# Altium PCB RYA_ESC.PcbDoc (part 4 of 4)
Units mm, origin at the board's own origin, x right, y up, seen from the top; angles counter-clockwise.
Board outline 81.86 x 50.16 mm, 4 copper layers (Top Layer, Signal1, Signal2, Bottom Layer), stack 1.586 mm thick; 309 components, 155 nets, 862 pads, 372 vias.
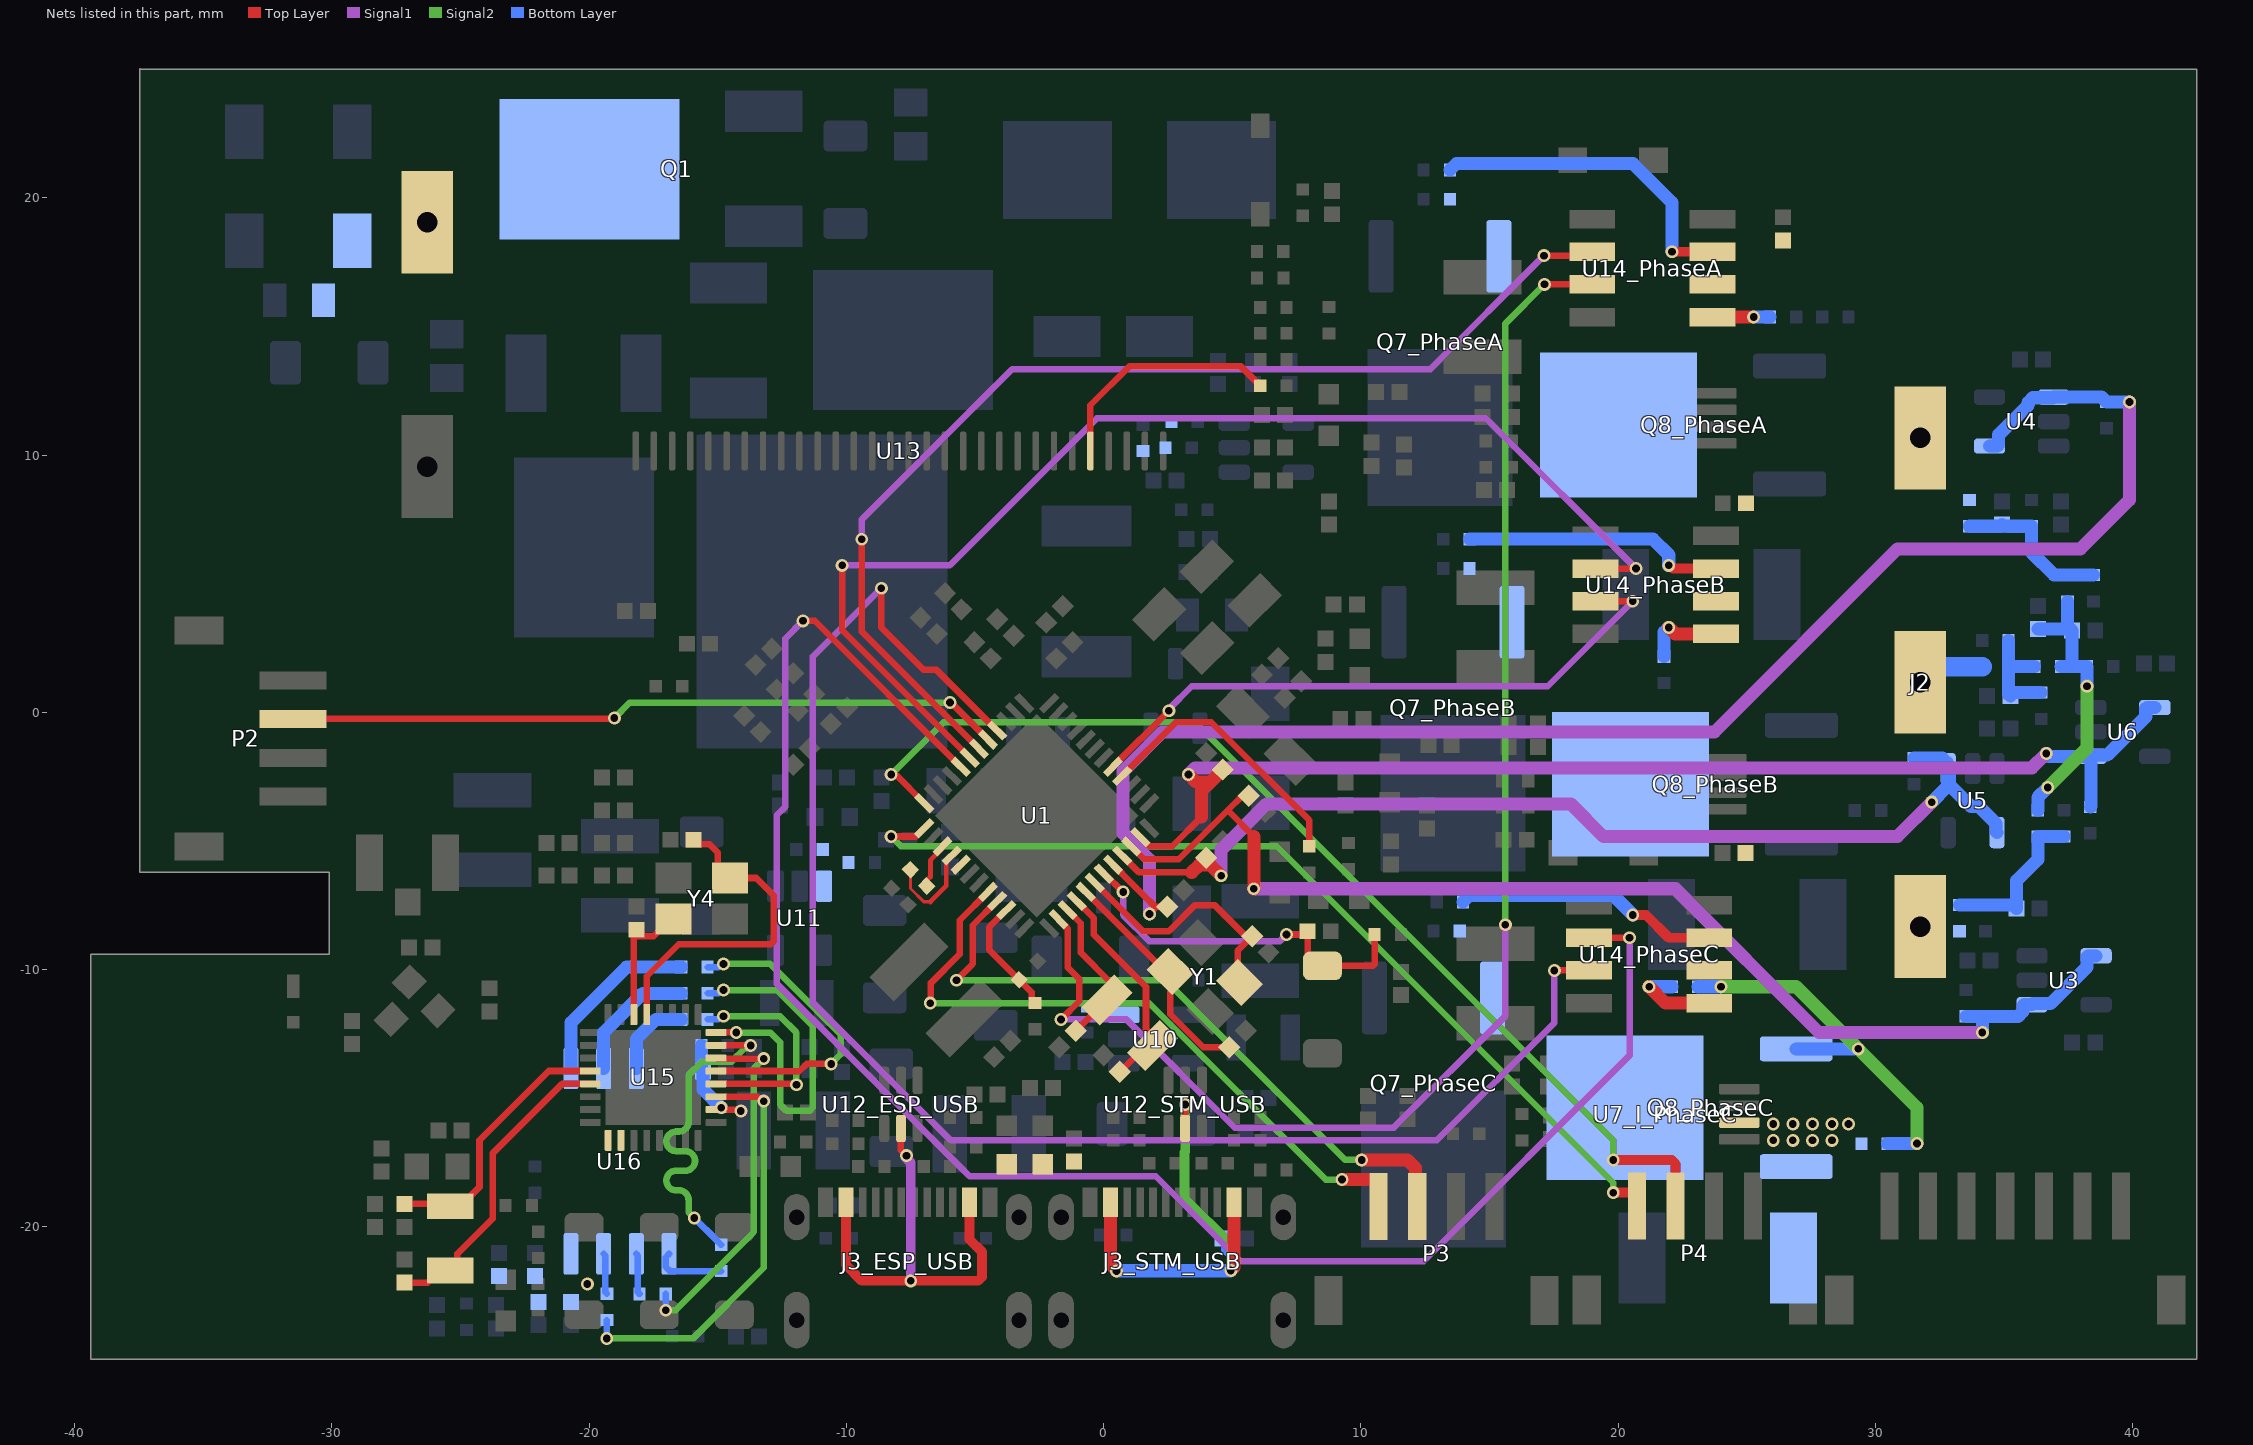
[diagram p5: the nets of this part, all layers, seen from the top]

## Via types
v1: diameter 0.5, hole 0.3, Top Layer to Bottom Layer, tented both sides, 148 vias
v2: diameter 0.5, hole 0.3, Top Layer to Signal1, tented both sides, 58 vias
v3: diameter 0.5, hole 0.3, Top Layer to Signal2, tented both sides, 52 vias
v4: diameter 1.27, hole 0.711, Top Layer to Bottom Layer, tented both sides, 48 vias
v5: diameter 0.508, hole 0.3, Top Layer to Bottom Layer, tented both sides, 34 vias
v6: diameter 0.5, hole 0.3, Bottom Layer to Signal2, tented both sides, 19 vias
v7: diameter 0.5, hole 0.3, Bottom Layer to Signal1, tented both sides, 5 vias
v8: diameter 1.27, hole 0.711, Top Layer to Bottom Layer, 4 vias
v9: diameter 0.5, hole 0.3, Signal1 to Signal2, tented both sides, 4 vias

## Nets (pads, with @x,y where several pads share a name; then routed paths per layer and width w, separated by ;. In a path a pad name is that pad's centre, name@x,y a point inside that pad or via, vN(x,y) a via of type N, cw(c..) or ccw(c..) an arc to the next point about the centre after c; other vN are vias at no path point) (continued)
NetQ8_PhaseC_1: Q8_PhaseC.1 R59_PhaseC.2 R60_PhaseC.2 | length 15.4
  Signal2 w0.508: v6(24.003,-10.668) 26.924,-10.668 31.623,-15.367 v6(31.623,-16.764)
  Bottom Layer w0.127: v6@31.619,-16.768 v6(31.623,-16.764)
  Bottom Layer w0.508: R59_PhaseC.2@23.118,-10.668 v6(24.003,-10.668) ; Q8_PhaseC.1@26.924,-13.081 v6(29.337,-13.081) ; R60_PhaseC.2@30.484,-16.768 v6@31.619,-16.768
NetQ8_PhaseC_3: Q8_PhaseC.3 R26_I_PhaseC.1 R60_PhaseC.1 U7_I_PhaseC.2
  other v1: 26.035,-16.637 26.797,-16.637 27.559,-16.637 28.321,-16.637 26.035,-16.002 26.797,-16.002 27.559,-16.002 28.321,-16.002 28.956,-16.002
NetR5_1: R5.1 R6.2 U1.46 | length 4.6
  Top Layer w0.254: U1.46@-3.783,-7.686 -4.445,-8.349 -4.445,-9.233 R5.1@-3.283,-10.395 -2.79,-10.888 -2.79,-11.184 -2.679,-11.295 R6.2@-2.667,-11.295
NetR28_1: R28.1 R29.2 R31.2
NetR32_1: R32.1 R34.2 U10.3
NetR35_1: R35.1 R37.2 U11.3
NetR49_2: R49.2 U13.26 | length 9.3
  Top Layer w0.254: U13.26@-0.512,10.16 -0.512,11.934 1.016,13.462 5.326,13.462 5.969,12.819 5.981,12.819 6.092,12.708 R49.2@6.092,12.696
NetR57_PhaseA_1: R57_PhaseA.1 U14_PhaseA.7 | length 12.9
  Top Layer w0.381: v1(22.098,17.907) U14_PhaseA.7@23.676,17.907
  Bottom Layer w0.508: R57_PhaseA.1@13.466,21.082 13.72,21.336 20.574,21.336 22.098,19.812 v1(22.098,17.907)
NetR57_PhaseB_1: R57_PhaseB.1 U14_PhaseB.7 | length 10.3
  Top Layer w0.381: v1(21.971,5.715) 22.003,5.715 22.13,5.588 U14_PhaseB.7@23.803,5.588
  Bottom Layer w0.508: R57_PhaseB.1@14.228,6.731 21.36,6.731 21.971,6.12 v1(21.971,5.715)
NetR57_PhaseC_1: R57_PhaseC.1 U14_PhaseC.7 | length 10.4
  Top Layer w0.381: v1(20.574,-7.874) 21.082,-7.874 21.971,-8.763 U14_PhaseC.7@23.549,-8.763
  Bottom Layer w0.508: R57_PhaseC.1@13.974,-7.366 14.228,-7.112 19.812,-7.112 v1(20.574,-7.874)
NetR59_PhaseA_1: R59_PhaseA.1 U14_PhaseA.5 | length 2.2
  Top Layer w0.508: U14_PhaseA.5@23.676,15.367 v1(25.273,15.367)
  Bottom Layer w0.508: v1(25.273,15.367) R59_PhaseA.1@25.904,15.367
NetR59_PhaseB_1: R59_PhaseB.1 U14_PhaseB.5 | length 3.5
  Top Layer w0.127: U14_PhaseB.5@23.549,3.302 U14_PhaseB.5@23.803,3.048
  Top Layer w0.508: v1(21.971,3.302) 22.225,3.048 U14_PhaseB.5@23.803,3.048
  Bottom Layer w0.508: R59_PhaseB.1@21.789,2.163 21.789,3.12 v1(21.971,3.302)
NetR59_PhaseC_1: R59_PhaseC.1 U14_PhaseC.5 | length 3.5
  Top Layer w0.508: v1(21.209,-10.668) 21.844,-11.303 U14_PhaseC.5@23.549,-11.303
  Bottom Layer w0.508: v1(21.209,-10.668) R59_PhaseC.1@22.094,-10.668
NetR63_2: R63.2 U16.1 | length 7
  Bottom Layer w0.508: U16.1@-20.701,-13.843 -20.701,-12.065 -18.542,-9.906 R63.2@-16.415,-9.906
NetR64_2: R64.2 U16.6 | length 1.6
  Bottom Layer w0.254: U16.6@-18.161,-21.053 -18.099,-21.114 -18.099,-22.545 R64.2@-18.038,-22.606
NetR65_2: R65.2 U16.5 | length 2.8
  Bottom Layer w0.254: U16.5@-16.891,-21.053 -17.018,-21.18 -17.018,-21.558 -16.855,-21.721 R65.2@-14.859,-21.721
NetR66_2: R66.2 U16.2 | length 5
  Bottom Layer w0.508: U16.2@-19.431,-13.843 -19.431,-12.446 -17.907,-10.922 R66.2@-16.415,-10.922
NetR70_2: R70.2 U16.3 | length 3.2
  Bottom Layer w0.508: U16.3@-18.161,-13.843 -18.161,-12.7 -17.399,-11.938 R70.2@-16.415,-11.938
NetR71_2: R71.2 U16.7 | length 1.6
  Bottom Layer w0.254: U16.7@-19.431,-21.053 -19.367,-21.116 -19.367,-22.538 R71.2@-19.304,-22.602
NetU1_2: U1.2 U14_PhaseA.3 | length 56.3
  Top Layer w0.254: U1.2@-1.753,-8.04 -1.753,-8.051 -1.397,-8.407 -1.397,-9.906 -0.942,-10.361 -0.942,-11.229 v2(-1.651,-11.938) ; v3(17.145,16.637) U14_PhaseA.3@18.996,16.637
  Signal1 w0.254: v2(-1.651,-11.938) 0.889,-11.938 5.101,-16.15 11.275,-16.15 15.621,-11.804 v9(15.621,-8.255)
  Signal2 w0.254: v9(15.621,-8.255) 15.621,15.113 v3(17.145,16.637)
NetU1_17: U1.17 U14_PhaseB.3 | length 24.4
  Top Layer w0.127: U1.17@0.368,-2.121 U1.17@0.368,-2.11
  Top Layer w0.254: U1.17@0.368,-2.11 v2(2.54,0.062) ; U14_PhaseB.3@19.123,4.318 v2(20.574,4.318)
  Signal1 w0.254: v2(2.54,0.062) 2.54,0.127 3.429,1.016 17.272,1.016 v2(20.574,4.318)
NetU1_28: U1.28 U14_PhaseC.3 | length 61.2
  Top Layer w0.254: v2(-8.636,4.826) -8.636,3.302 -6.985,1.651 -6.494,1.651 U1.28@-4.136,-0.707 ; v2(17.526,-10.033) U14_PhaseC.3@18.869,-10.033
  Signal1 w0.254: v2(-8.636,4.826) -11.303,2.159 -11.303,-11.281 -5.947,-16.637 12.954,-16.637 17.526,-12.065 v2@17.526,-10.04
NetU1_30: U1.30 U14_PhaseA.2 | length 43.5
  Top Layer w0.127: U14_PhaseA.2@18.843,17.754 U14_PhaseA.2@18.996,17.907
  Top Layer w0.254: v2(-9.398,6.731) -9.398,3.141 U1.30@-4.843,-1.414 ; v2(17.119,17.754) U14_PhaseA.2@18.843,17.754
  Signal1 w0.254: v2(-9.398,6.731) -9.398,7.493 -3.556,13.335 12.7,13.335 v2(17.119,17.754)
NetU1_31: U1.31 U14_PhaseB.2 | length 46.8
  Top Layer w0.254: v2(-10.16,5.715) -10.16,3.195 U1.31@-5.197,-1.768 ; U14_PhaseB.2@19.123,5.588 v2(20.701,5.588)
  Signal1 w0.254: v2(-10.16,5.715) -5.969,5.715 -0.254,11.43 14.859,11.43 v2(20.701,5.588)
NetU1_32: U1.32 U14_PhaseC.2 | length 70.1
  Top Layer w0.254: v2(-11.684,3.556) -11.228,3.556 U1.32@-5.55,-2.121 ; U14_PhaseC.2@18.869,-8.763 v2(20.447,-8.763)
  Signal1 w0.254: v2(-11.684,3.556) -12.376,2.864 -12.376,-3.677 -12.7,-4.001 -12.7,-10.541 -5.207,-18.034 2.032,-18.034 5.334,-21.336 12.446,-21.336 20.447,-13.335 v2(20.447,-8.763)
NetU1_41: U1.41
NetU15_9: U15.9
NetU15_10: U15.10
NeuSig: C36.2 R24.2 U1.11 U6.1 U6.4 | length 47
  Top Layer w0.254: U1.11@1.429,-4.858 1.44,-4.858 1.789,-5.207 2.667,-5.207 3.81,-4.064
  Top Layer w0.508: v2(3.302,-2.413) 3.601,-2.712 4.148,-2.712 ; 3.81,-4.064 3.81,-3.049 4.148,-2.712 ; C36.2@4.636,-2.223 4.148,-2.712
  Signal1 w0.508: v2(3.302,-2.413) 3.556,-2.159 36.084,-2.159 v7(36.645,-1.598)
  Bottom Layer w0.508: v7(36.645,-1.598) 36.759,-1.712 U6.1@38.379,-1.712 ; R24.2@38.358,-3.679 38.379,-3.658 U6.1@38.379,-1.712 ; U6.4@40.869,0.188 40.559,0.188 40.513,0.142 40.513,-0.168 39.015,-1.666 38.425,-1.666 U6.1@38.379,-1.712
NeuVolt: C26.2 C35.2 R11.1 R13.1 R15.1 R23.2 | length 11.4
  Signal2 w0.508: v6(36.703,-2.921) 38.227,-1.397 v6(38.227,1.016)
  Bottom Layer w0.508: R11.1@36.318,-3.806 36.318,-3.306 v6(36.703,-2.921) ; C35.2@36.322,3.233 37.592,3.233 C26.2@37.65,3.175 ; R13.1@37.215,1.782 37.219,1.778 37.576,1.778 ; R15.1@37.469,4.314 37.469,3.356 C26.2@37.65,3.175 ; v6(38.227,1.016) 38.223,1.02 R23.2@38.223,1.778 37.576,1.778 ; 37.576,1.778 37.65,1.852 C26.2@37.65,3.175
OSC32_IN: C20.2 U1.3 Y2.1 | length 6
  Top Layer w0.254: U1.3@-1.4,-7.686 -0.889,-8.197 -0.889,-9.34 0.278,-10.508 0.278,-11.035 Y2.1@0.132,-11.181 0.122,-11.181 C20.2@-1.079,-12.382
OSC32_OUT: C21.2 U1.4 Y2.2 | length 8.6
  Top Layer w0.254: U1.4@-1.046,-7.333 -0.372,-8.007 -0.372,-8.645 1.651,-10.668 1.651,-12.326 2.027,-12.702 2.027,-12.822 Y2.2@1.9,-12.949 1.659,-12.949 C21.2@0.636,-13.971
OSC_IN: C18.2 U1.5 Y1.1 | length 9.2
  Top Layer w0.254: U1.5@-0.692,-6.979 2.149,-9.821 2.339,-9.821 2.466,-9.948 Y1.1@2.664,-10.146 ; Y1.1@2.591,-10.077 2.664,-10.151 2.664,-10.815 2.591,-10.888 2.591,-11.735 3.874,-13.018 C18.2@4.889,-13.018
OSC_OUT: C19.2 U1.6 Y1.3 | length 9.9
  Top Layer w0.254: U1.6@-0.339,-6.626 1.544,-8.509 2.54,-8.509 3.556,-7.493 4.318,-7.493 5.524,-8.699 C19.2@5.778,-8.699 5.21,-9.267 5.21,-10.428 Y1.3@5.281,-10.499
PC4: R4.2 U1.16 | length 10.7
  Top Layer w0.254: U1.16@0.722,-2.475 2.816,-0.381 4.191,-0.381 7.997,-4.187 R4.2@7.997,-5.203
PhaseA: C79_PhaseA.2 J2.1 Q7_PhaseA.3 Q8_PhaseA.4 R8.2 R58_PhaseA.1 U14_PhaseA.6
PhaseB: C79_PhaseB.2 J2.2 Q7_PhaseB.3 Q8_PhaseB.4 R9.2 R58_PhaseB.1 U14_PhaseB.6 | length 2.7
  Bottom Layer w0.762: J2.2@31.75,1.168 32.36,1.778 R9.2@34.155,1.778
PhaseC: C79_PhaseC.2 J2.3 Q7_PhaseC.3 Q8_PhaseC.4 R10.2 R58_PhaseC.1 U14_PhaseC.6
PhASig: C32.2 R21.2 U1.8 U4.1 U4.4 | length 63
  Top Layer w0.254: U1.8@0.368,-5.918 1.14,-6.69 1.499,-7.049 1.996,-7.547 2.007,-7.557 2.014,-7.557 ; v2(1.786,-7.839) 2.014,-7.612 2.014,-7.557 ; C32.2@2.476,-7.557 2.014,-7.557
  Signal1 w0.508: v2(1.786,-7.839) 1.786,-5.723 0.762,-4.699 0.762,-2.286 2.286,-0.762 23.749,-0.762 30.861,6.35 37.973,6.35 39.878,8.255 v7(39.878,12.065)
  Bottom Layer w0.127: R21.2@38.993,12.069 R21.2@38.997,12.065
  Bottom Layer w0.508: U4.4@34.442,10.353 34.752,10.353 34.798,10.399 34.798,10.795 35.941,11.938 35.941,12.042 36.127,12.228 36.907,12.228 U4.1@36.932,12.253 38.797,12.253 38.981,12.069 R21.2@38.993,12.069 ; R21.2@38.997,12.065 v7(39.878,12.065)
PhAVolt: C29.2 R8.1 R15.2 R16.2 R19.2 | length 6.3
  Bottom Layer w0.508: R8.1@33.659,7.235 34.863,7.235 C29.2@34.925,7.297 34.981,7.241 35.161,7.241 35.167,7.235 R19.2@36.068,7.235 36.068,6.223 36.953,5.338 R16.2@38.485,5.338
PhBSig: C33.2 R22.2 U1.9 U5.1 U5.4 | length 41.9
  Top Layer w0.254: U1.9@0.722,-5.565 1.38,-6.223 3.429,-6.223
  Top Layer w0.508: 3.429,-6.223 3.714,-5.938 ; C33.2@4,-5.652 3.714,-5.938 ; v2(4.572,-6.35) 4.16,-5.938 3.714,-5.938
  Signal1 w0.508: v2(4.572,-6.35) 4.572,-5.334 6.35,-3.556 18.161,-3.556 19.431,-4.826 30.861,-4.826 v7(32.196,-3.491)
  Bottom Layer w0.508: R22.2@31.5,-1.774 32.602,-1.774 32.832,-2.004 U5.1@32.832,-2.184 ; v7(32.196,-3.491) 32.805,-2.882 32.805,-2.211 U5.1@32.832,-2.184 ; U5.4@34.732,-4.674 34.686,-4.628 34.686,-4.318 34.026,-3.658 33.716,-3.658 32.878,-2.82 32.878,-2.23 U5.1@32.832,-2.184
PhBVolt: C31.2 R9.1 R13.2 R17.2 R20.2 | length 4.5
  Bottom Layer w0.508: R17.2@35.183,2.79 35.183,1.782 R9.1@35.179,1.778 ; R13.2@36.191,1.782 36.187,1.778 R9.1@35.179,1.778 ; R20.2@36.449,0.766 35.379,0.766 C31.2@35.248,0.635 35.179,0.704 R9.1@35.179,1.778
PhCSig: C25.2 R14.2 U1.10 U3.1 U3.4 | length 46.9
  Top Layer w0.254: U1.10@1.075,-5.211 1.579,-5.715 2.921,-5.715 4.826,-3.81 ; C25.2@5.651,-3.238 5.398,-3.238 4.826,-3.81 ; 5.842,-4.826 4.826,-3.81
  Top Layer w0.508: v2(5.842,-6.858) 5.842,-4.826
  Signal1 w0.508: v2(5.842,-6.858) 22.225,-6.858 27.813,-12.446 v7(34.163,-12.446)
  Bottom Layer w0.508: R14.2@33.536,-11.815 34.163,-11.815 ; v7(34.163,-12.446) 34.163,-11.815 ; U3.4@38.583,-9.464 38.273,-9.464 38.227,-9.51 38.227,-9.906 36.815,-11.318 36.139,-11.318 U3.1@36.093,-11.364 35.783,-11.364 35.737,-11.41 35.737,-11.629 35.551,-11.815 34.163,-11.815
PhCVolt: C24.2 R10.1 R11.2 R12.2 R18.2 | length 6.4
  Bottom Layer w0.508: R10.1@33.27,-7.489 R12.2@34.29,-7.489 35.36,-7.489 C24.2@35.491,-7.62 35.491,-6.546 36.318,-5.719 R11.2@36.318,-4.83 R18.2@37.334,-4.83
PWM_IN: P2.2 U1.29 | length 27.9
  Top Layer w0.254: P2.2@-31.513,-0.266 -31.489,-0.242 -19.038,-0.242 v3(-19.014,-0.218) ; v3(-5.969,0.381) -5.931,0.381 U1.29@-4.49,-1.061
  Signal2 w0.254: v3(-19.014,-0.218) -18.415,0.381 v3(-5.969,0.381)
RESET: C12.2 R7.1 U1.7 U2.2 | length 14.4
  Top Layer w0.127: U1.7@0.015,-6.272 U1.7@0.049,-6.272
  Top Layer w0.254: U1.7@0.049,-6.272 v2(0.762,-6.985) ; v2(7.112,-8.636) 7.805,-8.636 C12.2@7.932,-8.509 7.932,-9.379 U2.2@8.41,-9.857 ; U2.2@8.509,-9.857 10.467,-9.857 10.541,-9.783 10.541,-8.636 R7.1@10.537,-8.632
  Signal1 w0.254: v2(0.762,-6.985) 0.762,-7.874 1.778,-8.89 6.858,-8.89 v2(7.112,-8.636)
SPICLK: R64.1 U15.22 | length 14.1
  Top Layer w0.127: U15.22@-15.061,-13.442 U15.22@-15.041,-13.462
  Top Layer w0.254: U15.22@-15.041,-13.462 v3(-13.208,-13.462)
  Signal2 w0.254: v6(-17.018,-23.241) -16.637,-23.241 -13.593,-20.197 -13.593,-13.847 v3(-13.208,-13.462)
  Bottom Layer w0.127: v6(-17.018,-23.241) v6@-17.014,-23.237
  Bottom Layer w0.254: v6@-17.014,-23.237 R64.1@-17.014,-22.606
SPICS0: R63.1 U15.21 | length 12.3
  Top Layer w0.127: U15.21@-15.061,-13.942 U15.21@-15.047,-13.956
  Top Layer w0.254: U15.21@-15.047,-13.95 -15.039,-13.942 -12.723,-13.942 -12.709,-13.956 -11.826,-13.956 -11.538,-13.668 v3(-10.589,-13.668)
  Signal2 w0.254: v6(-14.777,-9.779) -12.954,-9.779 -10.212,-12.521 -10.212,-13.291 v3(-10.589,-13.668)
  Bottom Layer w0.254: R63.1@-15.391,-9.906 -14.97,-9.906 -14.843,-9.779 v6(-14.777,-9.779)
SPID: R65.1 U15.23 | length 14
  Top Layer w0.127: U15.23@-15.061,-12.942 U15.23@-15.055,-12.948 ; v3@-13.722,-12.948 v3(-13.716,-12.954)
  Top Layer w0.254: U15.23@-15.055,-12.948 v3@-13.722,-12.948
  Signal2 w0.254: v6(-15.908,-19.652) -16.129,-19.431 -16.129,-19.087 -16.129,-18.96 ccw(c-16.51,-18.96) -16.51,-18.579 -16.613,-18.579 cw(c-16.613,-18.198) -16.613,-17.817 -16.261,-17.817 ccw(c-16.261,-17.436) -16.261,-17.055 -16.613,-17.055 cw(c-16.613,-16.674) -16.613,-16.293 -16.51,-16.293 ccw(c-16.51,-15.912) -16.129,-15.912 -16.129,-14.728 -16.129,-14.097 -15.621,-13.589 -14.478,-13.589 -13.945,-13.056 -13.885,-13.056 -13.783,-12.954 v3(-13.716,-12.954)
  Bottom Layer w0.254: v6(-15.908,-19.652) -15.045,-20.515 -15.045,-20.523 -14.871,-20.697 R65.1@-14.859,-20.697
SPIHD: R71.1 U15.19 | length 16.4
  Top Layer w0.254: U15.19@-15.061,-14.942 -13.446,-14.942 -13.275,-15.113 v3(-13.208,-15.113)
  Signal2 w0.254: v6(-19.31,-24.339) -15.957,-24.339 -13.208,-21.59 v3(-13.208,-15.113)
  Bottom Layer w0.254: v6@-19.304,-24.384 R71.1@-19.304,-23.626
SPIQ: R66.1 U15.24 | length 14.4
  Top Layer w0.127: U15.24@-15.061,-12.442 U15.24@-15.059,-12.444 ; v3@-14.281,-12.444 v3(-14.279,-12.446)
  Top Layer w0.254: U15.24@-15.059,-12.444 v3@-14.281,-12.444
  Signal2 w0.254: v6(-14.777,-10.795) -12.7,-10.795 -11.306,-12.189 -11.306,-15.37 -11.43,-15.494 -12.319,-15.494 -12.573,-15.24 -12.573,-12.827 -12.954,-12.446 v3(-14.279,-12.446)
  Bottom Layer w0.254: R66.1@-15.391,-10.922 -14.97,-10.922 -14.843,-10.795 v6(-14.777,-10.795)
SPIWP: R70.1 U15.20 | length 8.9
  Top Layer w0.254: U15.20@-15.061,-14.442 -11.974,-14.442 v3(-11.938,-14.478)
  Signal2 w0.254: v6(-14.777,-11.811) -12.573,-11.811 -11.938,-12.446 v3(-11.938,-14.478)
  Bottom Layer w0.254: R70.1@-15.391,-11.938 -14.97,-11.938 -14.843,-11.811 v6(-14.777,-11.811)
ST_SWCLK: P4.1 U1.37 | length 36.8
  Top Layer w0.254: v3(-8.255,-4.826) -7.298,-4.826 -6.976,-4.504 U1.37@-6.965,-4.504
  Top Layer w0.381: v3(19.812,-18.669) 20.577,-18.669 20.737,-18.829 P4.1@20.737,-19.194
  Signal2 w0.254: v3(-8.255,-4.826) -7.874,-5.207 6.731,-5.207 19.812,-18.288 v3(19.812,-18.669)
ST_SWDIO: P4.2 U1.36 | length 42.3
  Top Layer w0.254: v3(-8.255,-2.413) -8.208,-2.46 -8.04,-2.46 U1.36@-6.965,-3.536
  Top Layer w0.381: v3(19.812,-17.399) 22.088,-17.399 22.237,-17.548 P4.2@22.237,-19.194
  Signal2 w0.254: v3(-8.255,-2.413) -6.223,-0.381 3.556,-0.381 19.812,-16.637 v3(19.812,-17.399)
ST_UART1_RX: P3.2 U1.45 | length 26.1
  Top Layer w0.254: v3(-5.715,-10.414) -5.08,-9.779 -5.08,-8.277 U1.45@-4.136,-7.333
  Top Layer w0.508: v3(10.033,-17.399) 11.811,-17.399 12.132,-17.72 12.132,-19.147 P3.2@12.195,-19.21
  Signal2 w0.254: v3(-5.715,-10.414) 2.413,-10.414 9.398,-17.399 v3(10.033,-17.399)
ST_UART1_TX: P3.1 U1.44 | length 26.5
  Top Layer w0.254: v3(-6.737,-11.305) -6.711,-11.28 -6.711,-10.521 -5.588,-9.398 -5.588,-8.077 U1.44@-4.49,-6.979
  Top Layer w0.508: v3(9.271,-18.161) 9.274,-18.164 10.599,-18.164 10.695,-18.26 P3.1@10.695,-19.21
  Signal2 w0.254: v3(-6.737,-11.305) 1.78,-11.305 8.636,-18.161 v3(9.271,-18.161)
ST_UART4_RX: R3.2 U1.40 | length 3.9
  Top Layer w0.127: R3.2@-7.512,-6.115 -7.503,-6.124 -7.503,-6.848 -6.985,-7.366 -6.731,-7.366 ; U1.40@-6.112,-5.774 U1.40@-5.904,-5.565
  Top Layer w0.191: -6.731,-7.366 -6.112,-6.747 U1.40@-6.112,-5.774
ST_UART4_TX: R2.2 U1.39 | length 1.8
  Top Layer w0.191: R2.2@-6.877,-6.75 -6.877,-6.542 -6.731,-6.396 -6.731,-5.749 -6.257,-5.275 U1.39@-6.257,-5.211
USB5V: C69_ESP_USB.2 C69_STM_USB.2 FB5_ESP_USB.1 FB5_STM_USB.1 J3_ESP_USB.A4B9 J3_ESP_USB.B4A9 J3_STM_USB.A4B9 J3_STM_USB.B4A9 U12_ESP_USB.5 U12_STM_USB.5 | length 36.5
  Top Layer w0.127: U12_STM_USB.5@3.163,-16.163 U12_STM_USB.5@3.175,-16.175
  Top Layer w0.254: U12_ESP_USB.5@-7.874,-16.175 -7.874,-17.018 v2@-7.747,-17.145 ; U12_STM_USB.5@3.163,-16.163 3.175,-16.152 v3(3.175,-15.24)
  Top Layer w0.381: J3_ESP_USB.A4B9@-10.007,-19.05 -10.007,-21.489 -9.398,-22.098 v2(-7.493,-22.098) -4.875,-22.098 -4.726,-21.949 -4.726,-20.967 -5.207,-20.486 J3_ESP_USB.B4A9@-5.207,-19.05
  Top Layer w0.508: J3_STM_USB.A4B9@0.271,-19.05 0.271,-21.456 0.508,-21.693 v1(0.508,-21.717) ; v1(4.948,-21.697) 5.071,-21.574 J3_STM_USB.B4A9@5.071,-19.05
  Signal1 w0.381: v2(-7.66,-17.232) -7.66,-17.333 -7.493,-17.5 v2(-7.493,-22.098)
  Signal2 w0.381: v3(3.175,-15.24) 3.175,-17.074 3.152,-17.098 3.152,-18.9 4.948,-20.696 v1(4.948,-21.697)
  Bottom Layer w0.127: v1(0.508,-21.717) v1@0.518,-21.707
  Bottom Layer w0.381: C69_ESP_USB.2@4.63,-20.447 4.749,-20.566 4.749,-20.883 4.948,-21.082 v1(4.948,-21.697)
  Bottom Layer w0.508: v1@0.518,-21.707 v1@4.938,-21.707
VHin: C67.2 D9.C J1.2 Q1.4
Wifi_SPI_3V3: C94.2 C98.2 C99.2 C100.2 C101.2 R62.1 U15.18 U16.8 | length 3.6
  Top Layer w0.254: U15.18@-15.061,-15.442 -15.053,-15.45 -14.141,-15.45 v3(-14.097,-15.494)
  Bottom Layer w0.508: C94.2@-15.629,-13.908 R62.1@-15.629,-12.954 ; C94.2@-15.567,-13.97 -15.567,-14.659 v7(-14.859,-15.367)
  other v1: -20.066,-22.225
XTAL32_N: C103.2 U15.5 Y3.2 | length 12.1
  Top Layer w0.254: C103.2@-27.178,-22.167 -26.27,-22.167 -25.8,-21.697 Y3.2@-25.4,-21.697 -25.119,-21.416 -25.119,-21.055 -23.749,-19.685 -23.749,-17.145 -21.046,-14.442 U15.5@-19.951,-14.442
XTAL32_P: C102.2 U15.4 Y3.1 | length 10.5
  Top Layer w0.254: C102.2@-27.178,-19.108 -25.489,-19.108 Y3.1@-25.4,-19.197 -25,-19.197 -24.257,-18.454 -24.257,-16.637 -21.562,-13.942 U15.4@-19.951,-13.942
XTAL_N: C106.2 U15.29 Y4.1 | length 13.1
  Top Layer w0.254: U15.29@-17.756,-11.747 -17.756,-10.263 -16.51,-9.017 -12.939,-9.017 -12.827,-8.905 -12.827,-7.112 -13.5,-6.439 Y4.1@-14.521,-6.439 -14.989,-5.971 -14.989,-5.458 -15.311,-5.136 -15.75,-5.136 C106.2@-15.933,-4.953
XTAL_P: C107.2 U15.30 Y4.3 | length 5.1
  Top Layer w0.254: U15.30@-18.256,-11.747 -18.256,-8.705 -18.256,-8.546 C107.2@-18.161,-8.451 ; C107.2@-18.161,-8.705 -17.487,-8.705 -16.821,-8.039 Y4.3@-16.721,-8.039
pads on no net: J3_ESP_USB.A8 J3_ESP_USB.B8 J3_STM_USB.A8 J3_STM_USB.B8 P1.MP1 P1.MP2 P2.MP1 P2.MP2 P3.MP1 P3.MP2 P4.MP1 P4.MP2 U1.1 U7_I_PhaseA.1 U7_I_PhaseB.1 U7_I_PhaseC.1 U10.4 U11.4 U12_ESP_USB.1 U12_ESP_USB.3 U12_STM_USB.1 U12_STM_USB.3 U13.7

## Polygon pours and split planes (outlines as drawn)
VHin on Bottom Layer "NONET_L02_P-001" (solid, pour order 147): -31.242,14.986 -31.242,20.447 -27.686,20.447 -27.686,24.384 -17.653,24.384 -17.653,18.415 -22.098,18.415 -22.098,16.764 -29.591,16.764 -29.591,14.986
BatVoltage on Bottom Layer "NONET_L02_P-001" (solid, pour order 146): 1.905,5.461 -3.048,5.461 -3.048,10.668 -1.143,10.668 -1.143,13.208 1.524,13.208 1.524,23.368 7.493,23.368 7.493,19.685 16.383,19.685 16.383,7.493 12.065,7.493 10.541,5.969 10.541,0.127 16.891,0.127 16.891,-6.35 12.573,-6.35 11.049,-7.874 11.049,-13.335 16.002,-13.335 16.002,-21.336 8.636,-21.336 8.636,-14.605 8.636,14.097 3.81,14.097 3.81,13.462 3.048,13.462 3.048,10.795 0.635,10.795 0.635,8.509 1.905,8.509
GND on Bottom Layer "NONET_L02_P-001" (solid, pour order 140): 42.545,25.019 42.545,-25.146 -31.877,-25.146 -31.877,-9.398 -30.099,-9.398 -30.099,-6.223 -37.465,-6.223 -37.465,25.019
BatVoltage on Bottom Layer "NONET_L02_P-001" (solid, pour order 135): 7.239,22.606 19.431,22.606 19.431,21.717 7.239,21.717
3V3_2 on Bottom Layer "NONET_L02_P-001" (solid, pour order 129): -25.4,-1.778 -20.574,-1.778 -20.574,-5.842 -13.462,-5.842 -13.462,-9.525 -12.446,-9.525 -12.446,-12.573 -15.113,-12.573 -15.113,-7.112 -21.971,-7.112 -21.971,-4.826 -22.098,-4.699 -25.4,-4.699
3V3_2 on Bottom Layer "NONET_L02_P-001" (solid, pour order 128): -14.986,-13.462 -14.986,-12.573 -13.462,-12.573 -13.462,-10.16 -12.446,-10.16 -12.446,-12.573 -10.922,-12.573 -10.922,-13.335 -11.049,-13.462 -11.811,-13.462 -11.811,-18.161 -12.827,-19.177 -14.986,-19.177 -14.986,-18.034 -14.859,-17.907 -12.7,-17.907 -12.7,-13.589 -12.827,-13.462
NetC55_1 on Bottom Layer "NONET_L02_P-001" (solid, pour order 47): -5.588,-5.588 -5.588,-6.985 -6.096,-6.985 -6.096,-8.636 -9.779,-8.636 -9.779,-6.731 -7.239,-6.731 -7.239,-5.588
NetC64_1 on Bottom Layer "NONET_L02_P-001" (solid, pour order 49): -12.7,-8.128 -11.43,-8.128 -11.43,-10.033 -10.033,-10.033 -10.033,-12.065 -6.604,-12.065 -6.604,-13.843 -7.493,-13.843 -7.493,-16.002 -9.779,-16.002 -9.779,-17.907 -11.684,-17.907 -11.684,-14.478 -9.144,-14.478 -9.144,-13.462 -10.795,-13.462 -10.795,-12.446 -12.192,-12.446 -12.192,-9.906 -12.7,-9.906
3V3_1 on Bottom Layer "NONET_L02_P-001" (solid, pour order 114): 6.604,-11.43 8.509,-11.43 8.509,-18.415 4.191,-18.415 4.191,-17.399 7.366,-17.399 7.366,-13.97 6.604,-13.97
NetC58_1 on Bottom Layer "NONET_L02_P-001" (solid, pour order 112): 2.54,-13.208 4.318,-13.208 4.318,-9.525 7.747,-9.525 7.747,-11.176 6.223,-11.176 6.223,-14.097 5.842,-14.097 5.842,-17.145 2.54,-17.145
3V3_2 on Bottom Layer "NONET_L02_P-001" (solid, pour order 92): -16.129,-23.876 -16.129,-25.019 -28.829,-25.019 -28.829,-15.875 -14.732,-15.875 -14.732,-19.177 -27.686,-19.177 -27.686,-23.945 -24.257,-23.945 -24.257,-24.511 -17.272,-24.511 -17.272,-23.876
NetC55_1 on Bottom Layer "NONET_L02_P-001" (solid, pour order 85): -2.032,-16.51 -2.032,-18.161 -3.81,-18.161 -3.81,-14.351 -1.143,-14.351 -1.143,-11.938 -0.127,-11.938 -0.127,-13.335 1.651,-13.335 1.651,-14.859 -0.381,-14.859 -0.381,-16.383 -2.032,-16.383
NetR32_1 on Bottom Layer "NONET_L02_P-001" (solid, pour order 83): 1.778,-12.192 1.778,-11.938 2.794,-10.922 3.175,-10.922 3.175,-10.033 2.159,-10.033 2.159,-10.414 1.905,-10.668 -0.889,-10.668 -1.27,-11.049 -1.27,-11.811 0,-11.811 0.381,-12.192
NetR35_1 on Bottom Layer "NONET_L02_P-001" (solid, pour order 82): -11.176,-4.953 -10.414,-4.953 -10.414,-5.588 -9.398,-5.588 -9.398,-6.223 -10.287,-6.223 -10.287,-7.747 -11.176,-7.747
3V3_1 on Bottom Layer "NONET_L02_P-001" (solid, pour order 80): 32.258,-4.191 34.036,-4.191 34.29,-4.445 34.29,-6.096 33.528,-6.096 33.528,-5.334 32.258,-5.334
3V3_1 on Bottom Layer "NONET_L02_P-001" (solid, pour order 79): 41.91,-1.524 41.91,-2.54 40.894,-2.54 40.894,-13.335 38.1,-13.335 38.1,-10.922 39.878,-10.922 39.878,-1.27 39.878,-10.922 39.878,-1.524
Wifi_SPI_3V3 on Bottom Layer "NONET_L02_P-001" (solid, pour order 74): -24.003,-21.463 -21.336,-21.463 -21.336,-19.939 -20.066,-19.939 -20.066,-23.368 -22.733,-23.368 -22.733,-22.352 -24.003,-22.352
3V3_1 on Bottom Layer "NONET_L02_P-001" (solid, pour order 50): 35.306,11.811 35.306,12.954 36.068,12.954 36.068,14.732 33.655,14.732 33.655,11.811 33.909,11.811
NetC61_1 on Bottom Layer "NONET_L02_P-001" (solid, pour order 46): -20.32,-3.302 -10.668,-3.302 -10.668,-4.445 -11.557,-4.445 -11.557,-5.715 -12.573,-5.715 -12.573,-7.493 -13.462,-7.493 -13.462,-5.842 -20.32,-5.842
5Vout on Bottom Layer "NONET_L02_P-001" (solid, pour order 45): -10.414,-2.54 -10.414,-4.445 -9.144,-4.445 -9.144,-4.191 -7.62,-4.191 -7.62,-5.334 -5.08,-5.334 -5.08,-2.54 -6.731,-2.54
NetF4_0 on Bottom Layer "NONET_L02_P-001" (solid, pour order 44): -4.699,-1.778 -3.048,-1.778 -3.048,-2.286 -1.524,-2.286 -1.524,-4.064 -1.651,-3.937 -4.699,-3.937
NetD16_K on Bottom Layer "NONET_L02_P-001" (solid, pour order 43): -0.635,-5.461 -0.635,-4.318 -4.445,-4.318 -4.445,-8.128 -5.08,-8.128 -5.08,-10.033 -3.429,-10.033 -3.429,-5.461
NetD14_K on Bottom Layer "NONET_L02_P-001" (solid, pour order 42): -2.921,-5.842 -1.397,-5.842 -1.397,-10.795 -2.921,-10.795
NetD14_K on Bottom Layer "NONET_L02_P-001" (solid, pour order 41): -2.032,0.127 -2.032,-1.778 0,-1.778 0,-5.842 1.651,-5.842 1.651,-1.778 2.54,-1.778 2.54,0.127
NetD13_A on Bottom Layer "NONET_L02_P-001" (solid, pour order 37): 2.032,-2.286 7.493,-2.286 7.493,-4.699 2.032,-4.699
5Vin on Bottom Layer "NONET_L02_P-001" (solid, pour order 36): -2.921,3.429 2.54,3.429 2.54,7.239 3.683,7.239 3.683,4.699 4.064,4.699 4.064,2.413 6.985,2.413 6.985,-0.635 5.207,-0.635 5.207,1.016 -2.921,1.016
NetR28_1 on Bottom Layer "NONET_L02_P-001" (solid, pour order 33): 0.889,10.541 0.889,9.906 3.175,9.906 3.175,11.811 2.286,11.811 2.286,10.541
BAT_Volt on Bottom Layer "NONET_L02_P-001" (solid, pour order 32): 8.255,11.557 6.096,11.557 6.096,9.779 2.413,9.779 2.413,7.366 3.556,7.366 3.556,8.763 6.858,8.763 6.858,9.779 8.255,9.779
NetC48_2 on Bottom Layer "NONET_L02_P-001" (solid, pour order 31): 8.001,13.081 3.302,13.081 3.302,10.795 5.842,10.795 5.842,12.192 8.001,12.192
NetF3_1 on Bottom Layer "NONET_L02_P-001" (solid, pour order 30): -12.065,17.272 -5.207,17.272 -5.207,23.495 0.381,23.495 0.381,16.51 -3.683,16.51 -3.683,11.43 -12.065,11.43
NetD10_A on Bottom Layer "NONET_L02_P-001" (solid, pour order 29): -16.129,24.638 -9.144,24.638 -9.144,22.606 -6.604,22.606 -6.604,20.828 -16.129,20.828
NetD10_K on Bottom Layer "NONET_L02_P-001" (solid, pour order 28): -27.178,13.97 -24.765,13.97 -24.765,13.208 -20.955,13.208 -20.955,17.907 -16.256,17.907 -16.256,19.812 -9.906,19.812 -9.906,17.907 -13.97,17.907 -13.97,15.494 -17.907,15.494 -17.907,10.16 -27.178,10.16
NetD12_K on Bottom Layer "NONET_L02_P-001" (solid, pour order 26): -29.337,12.7 -29.337,16.637 -21.59,16.637 -21.59,13.589 -23.368,13.589 -23.368,14.097 -27.559,14.097 -27.559,12.7
NetD9_A on Bottom Layer "NONET_L02_P-001" (solid, pour order 24): -34.925,24.003 -28.321,24.003 -28.321,20.828 -34.925,20.828
PhaseC on Bottom Layer "NONET_L02_P-001" (solid, pour order 11): 13.462,-7.874 18.923,-7.874 18.923,-11.176 29.972,-11.176 29.972,-5.842 33.274,-5.842 33.274,-16.256 30.099,-16.256 30.099,-15.24 25.019,-15.24 25.019,-19.177 16.256,-19.177 16.256,-12.7 13.462,-12.7
PhaseA on Bottom Layer "NONET_L02_P-001" (solid, pour order 10): 13.335,20.574 13.335,14.605 16.764,14.605 16.764,7.239 24.257,7.239 24.257,11.811 29.337,11.811 29.337,6.985 32.893,6.985 34.544,6.985 34.544,9.271 33.401,9.271 33.401,17.653 28.829,17.653 28.829,17.145 24.638,17.145 18.161,17.145 18.161,20.574
PhaseB on Bottom Layer "NONET_L02_P-001" (solid, pour order 8): 19.05,5.588 13.716,5.588 13.716,0.381 17.272,0.381 17.272,-5.715 24.638,-5.715 24.638,-2.413 30.353,-2.413 30.353,-1.143 33.528,-1.143 33.528,4.445 29.591,4.445 29.591,1.778 19.05,1.778
NetQ8_PhaseA_3 on Bottom Layer "NONET_L02_P-001" (solid, remove dead copper, pour order 4): 24.511,11.557 29.083,11.557 29.083,2.286 24.511,2.286
NetQ8_PhaseC_3 on Bottom Layer "NONET_L02_P-001" (solid, pour order 3): 25.4,-15.494 29.718,-15.494 29.718,-23.876 25.4,-23.876
NetQ8_PhaseB_3 on Bottom Layer "NONET_L02_P-001" (solid, pour order 0): 24.892,-2.794 29.718,-2.794 29.718,-10.922 24.892,-10.922
BatVoltage on Top Layer "NONET_L02_P-001" (solid, pour order 145): 17.145,-4.699 19.558,-4.699 19.558,-6.604 20.066,-6.604 20.066,-8.128 17.399,-8.128 17.399,-6.985 13.081,-6.985 13.081,-5.207 17.145,-5.207
BatVoltage on Top Layer "NONET_L02_P-001" (solid, pour order 144): 16.51,9.779 18.796,9.779 18.796,7.493 20.193,7.493 20.193,6.35 15.494,6.35 15.494,7.874 16.51,7.874
BatVoltage on Top Layer "NONET_L02_P-001" (solid, pour order 143): 20.066,22.733 20.066,18.669 14.351,18.669 14.351,22.733
3V3_1 on Top Layer "NONET_L02_P-001" (solid, pour order 142): 37.084,15.875 37.211,15.748 37.211,-3.429 35.306,-3.429 35.179,-3.302 35.179,15.875 35.179,-3.302 35.179,15.875
GND on Top Layer "NONET_L02_P-001" (solid, pour order 137): 42.545,25.019 42.545,-25.146 -31.242,-25.146 -31.242,-9.398 -30.099,-9.398 -30.099,-6.223 -37.465,-6.223 -37.465,25.019
3V3_1 on Top Layer "NONET_L02_P-001" (solid, pour order 65): -7.239,-12.319 -4.699,-9.779 -3.048,-11.43 -4.064,-12.446 -3.302,-13.208 -4.064,-13.97 -4.826,-13.208 -5.588,-13.97
3V3_2 on Top Layer "NONET_L02_P-001" (solid, pour order 53): -19.304,-11.811 -18.669,-11.811 -18.669,-7.112 -19.304,-7.112 -19.304,-2.032 -22.479,-2.032 -22.479,-2.413 -22.479,-3.937 -21.082,-3.937 -21.082,-7.747 -19.304,-7.747
3V3_1 on Top Layer "NONET_L02_P-001" (solid, pour order 126): 6.731,-12.446 6.731,-11.43 12.573,-11.43 12.573,-14.097 11.049,-14.097 11.049,-12.446
3V3_1 on Top Layer "NONET_L02_P-001" (solid, pour order 124): 26.416,-10.922 35.433,-10.922 35.433,-14.224 34.417,-15.24 26.416,-15.24 26.416,-13.843 22.479,-13.843 22.479,-14.605 21.463,-15.621 19.812,-15.621 19.812,-13.97 20.828,-13.97 20.828,-12.192 26.416,-12.192
5Vout on Top Layer "NONET_L02_P-001" (solid, pour order 118): -4.572,-14.478 -4.572,-15.24 -4.318,-15.24 -4.318,-16.764 -1.651,-16.764 -1.651,-15.748 -1.016,-15.748 -1.016,-15.113 -0.254,-15.113 -0.254,-14.097 -1.143,-14.097 -1.143,-14.605 -1.524,-14.605 -1.524,-15.113 -2.413,-15.113 -2.413,-14.478
3V3_1 on Top Layer "NONET_L02_P-001" (solid, pour order 116): 30.099,-18.669 30.099,-13.843 34.671,-13.843 34.671,-4.572 37.592,-4.572 37.592,-15.748 31.242,-15.748 31.242,-18.669
3V3_1 on Top Layer "NONET_L02_P-001" (solid, pour order 115): 14.478,-17.526 16.256,-17.526 16.256,-20.955 24.638,-20.955 24.638,-17.907 31.242,-17.907 31.242,-22.86 29.591,-22.86 29.591,-20.955 26.289,-20.955 26.289,-22.987 19.812,-22.987 19.812,-21.717 14.478,-21.717 14.478,-17.78
3V3_2 on Top Layer "NONET_L02_P-001" (solid, pour order 94): -18.542,-16.637 -17.907,-16.637 -17.907,-17.399 -18.288,-17.78 -19.177,-17.78 -19.558,-18.161 -19.558,-19.304 -20.828,-19.304 -21.209,-19.685 -21.209,-20.447 -21.463,-20.701 -22.479,-20.701 -22.479,-19.558 -21.844,-19.558 -21.59,-19.304 -21.59,-18.034 -20.828,-17.272 -18.669,-17.272 -18.542,-17.145
VHin on Top Layer "NONET_L02_P-001" (solid, pour order 90): -29.083,22.225 -22.098,22.225 -22.098,15.494 -29.083,15.494
3V3_1 on Top Layer "NONET_L02_P-001" (solid, pour order 87): 5.715,6.35 5.715,9.398 7.112,9.398 7.112,7.112 12.827,7.112 12.827,3.81 17.145,3.81 17.145,0.508 18.669,0.508 18.669,-2.794 17.526,-2.794 17.526,-0.889 14.986,-0.889 14.986,0.889 13.081,0.889 13.081,2.667 11.176,2.667 11.176,-1.27 11.811,-1.27 11.811,-2.667 10.033,-2.667 10.033,-2.032 10.033,0.508 9.398,0.508 9.398,2.159 10.509,2.159 10.509,5.461 6.604,5.461
AS5600-SDA on Top Layer "NONET_L02_P-001" (solid, pour order 88): -5.461,11.938 -4.699,12.7 -4.699,9.398 -5.461,9.398
3V3_1 on Top Layer "NONET_L02_P-001" (solid, pour order 81): 33.147,-4.826 33.147,-3.302 38.862,-3.302 38.862,-2.54 41.402,-2.54 41.402,-4.826
3V3_1 on Top Layer "NONET_L02_P-001" (solid, pour order 78): -33.147,-3.556 -33.147,-2.54 -24.892,-2.54 -24.892,-0.762 -18.415,-0.762 -18.415,1.778 -16.891,1.778 -16.891,-1.651 -22.86,-1.651 -22.86,-3.556
3V3_2 on Top Layer "NONET_L02_P-001" (solid, pour order 75): -11.938,-15.748 -11.938,-15.367 -11.049,-15.367 -11.049,-17.145 -12.065,-17.145 -12.065,-16.256 -15.113,-16.256 -15.113,-15.748 -15.113,-16.129 -15.113,-15.748
3V3_1 on Top Layer "NONET_L02_P-001" (solid, pour order 71): -14.986,15.113 -10.795,15.113 -10.795,10.16 -14.986,10.16 -10.795,10.16 -14.986,10.16
USB5V on Top Layer "NONET_L02_P-001" (solid, pour order 68): -5.588,-19.939 -4.826,-19.939 -4.826,-18.034 0,-18.034 0,-19.788 0.635,-19.788 0.635,-17.565 -5.588,-17.565
3V3_1 on Top Layer "NONET_L02_P-001" (solid, pour order 66): -3.556,-8.509 -2.921,-7.874 -1.778,-9.017 -1.778,-9.652 -2.54,-10.414 -3.175,-9.779 -3.175,-9.652 -2.794,-9.271
3V3_1 on Top Layer "NONET_L02_P-001" (solid, pour order 64): -14.668,1.333 -13.589,2.413 -11.176,0 -10.795,0.381 -8.763,-1.651 -10.287,-3.175 -12.446,-1.016 -12.954,-1.524 -13.843,-0.635 -13.272,-0.064
3V3_1 on Top Layer "NONET_L02_P-001" (solid, pour order 61): 6.731,14.224 6.731,15.24 7.493,15.24 7.493,17.399 6.477,17.399 6.477,18.415 9.906,18.415 9.906,21.209 8.001,21.209 8.001,19.812 6.858,19.812 6.858,21.717 4.953,21.717 4.953,23.749 11.176,23.749 11.176,20.32 12.573,20.32 12.573,15.875 16.764,15.875 16.764,14.351 19.431,14.351 19.431,11.557 16.764,11.557 16.764,12.065 11.176,12.065 11.176,14.732 8.382,14.732 8.382,14.224 8.001,14.224
3V3_1 on Top Layer "NONET_L02_P-001" (solid, pour order 58): 11.684,-8.001 13.208,-8.001 13.208,-11.049 17.145,-11.049 17.145,-12.7 19.939,-12.7 19.939,-15.621 18.034,-15.621 18.034,-14.097 11.684,-14.097
3V3_2 on Top Layer "NONET_L02_P-001" (solid, pour order 51): -29.083,-19.431 -29.083,-17.399 -27.432,-17.399 -27.432,-15.875 -26.289,-15.875 -26.289,-18.288 -27.686,-18.288 -27.686,-19.431
NetC79_PhaseA_1 on Top Layer "NONET_L02_P-001" (solid, pour order 27): 20.574,18.796 24.892,18.796 24.892,19.05 27.178,19.05 27.178,20.447 22.352,20.447 22.352,22.225 20.574,22.225
PhaseA on Top Layer "NONET_L02_P-001" (solid, pour order 23): 22.352,16.002 22.352,17.399 26.035,17.399 26.035,18.542 34.29,18.542 34.29,6.858 30.353,6.858 30.353,16.002
NetQ8_PhaseC_3 on Top Layer "NONET_L02_P-001" (solid, pour order 22): 23.241,-15.621 29.718,-15.621 29.718,-17.653 23.241,-17.653
NetQ8_PhaseB_3 on Top Layer "NONET_L02_P-001" (solid, pour order 21): 22.606,-2.794 29.845,-2.794 29.845,-4.699 22.606,-4.699
NetQ8_PhaseA_3 on Top Layer "NONET_L02_P-001" (solid, pour order 20): 28.448,15.113 29.464,15.113 29.464,9.525 22.606,9.525 22.606,11.303 28.448,11.303
PhaseB on Top Layer "NONET_L02_P-001" (solid, pour order 18): 24.511,7.747 24.511,8.636 28.194,8.636 28.194,5.461 34.036,5.461 34.036,-1.651 26.162,-1.651 26.162,3.683 22.352,3.683 22.352,5.08 25.273,5.08 25.273,7.747
NetC79_PhaseB_1 on Top Layer "NONET_L02_P-001" (solid, pour order 16): 20.32,9.017 24.384,9.017 24.384,7.493 25.019,7.493 25.019,6.223 22.606,6.223 22.606,8.128 20.32,8.128
PhaseC on Top Layer "NONET_L02_P-001" (solid, pour order 15): 24.638,-5.207 24.638,-6.223 25.146,-6.223 25.146,-9.398 22.352,-9.398 22.352,-10.668 33.909,-10.668 33.909,-5.207
NetC79_PhaseC_1 on Top Layer "NONET_L02_P-001" (solid, pour order 14): 20.32,-5.207 24.384,-5.207 24.384,-6.731 24.892,-6.731 24.892,-8.128 22.098,-8.128 22.098,-6.858 20.32,-6.858
GND on Signal1 "NONET_L02_P-001" (solid, pour order 141): 42.545,25.019 42.545,-25.146 -31.496,-25.146 -31.496,-9.398 -30.099,-9.398 -30.099,-6.223 -37.465,-6.223 -37.465,25.019
3V3_1 on Signal1 "NONET_L02_P-001" (solid, pour order 103): -18.415,0 -18.415,1.524 -13.716,1.524 -13.716,0
3V3_1 on Signal1 "NONET_L02_P-001" (solid, pour order 130): -10.287,-2.413 -9.398,-2.413 -9.398,-8.255 -4.445,-13.208 -5.207,-13.97 -5.334,-13.97 -10.287,-9.017
3V3_1 on Signal1 "NONET_L02_P-001" (solid, pour order 106): -0.508,2.54 -4.826,2.54 -5.715,1.651 -10.287,1.651 -10.287,-3.048 -9.398,-3.048 -9.398,-0.762 -7.874,0.762 -5.461,0.762 -4.699,1.524 -3.683,1.524 -0.508,1.524
3V3_2 on Signal1 "NONET_L02_P-001" (solid, pour order 131): -11.176,-14.478 -9.652,-14.478 -9.652,-16.764 -15.748,-16.764 -15.748,-16.002 -11.176,-16.002
Wifi_SPI_3V3 on Signal1 "NONET_L02_P-001" (solid, pour order 132): -20.701,-21.717 -20.701,-23.495 -16.383,-23.495 -16.383,-15.621 -13.843,-15.621 -13.843,-14.732 -17.145,-14.732 -17.145,-21.717
GND on Signal2 "NONET_L02_P-001" (solid, pour order 136): 42.545,25.019 42.545,-25.146 -31.496,-25.146 -31.496,-9.398 -30.099,-9.398 -30.099,-6.223 -37.465,-6.223 -37.465,25.019
3V3_1 on Signal2 "NONET_L02_P-001" (solid, pour order 111): 6.985,21.59 38.608,21.59 38.608,14.986 35.179,14.986 35.179,19.946 6.985,19.812
3V3_1 on Signal2 "NONET_L02_P-001" (solid, pour order 110): 35.179,16.383 38.608,16.383 38.608,11.303 41.275,8.636 41.275,-5.207 32.766,-5.207 32.766,-3.429 37.338,-3.429 39.243,-1.524 39.243,5.969 35.179,10.033
3V3_1 on Signal2 "NONET_L02_P-001" (solid, pour order 125): 13.208,12.954 13.208,4.826 7.239,4.826 7.239,12.954 10.668,12.954
BatVoltage on Top Solder "NONET_L02_P-001" (solid, pour order 57): 17.145,-4.699 19.558,-4.699 19.558,-6.604 20.066,-6.604 20.066,-8.128 17.399,-8.128 17.399,-6.985 13.081,-6.985 13.081,-5.207 17.145,-5.207
BatVoltage on Top Solder "NONET_L02_P-001" (solid, pour order 133): 16.51,9.779 18.796,9.779 18.796,7.493 20.193,7.493 20.193,6.35 15.494,6.35 15.494,7.874 16.51,7.874
BatVoltage on Top Solder "NONET_L02_P-001" (solid, pour order 134): 20.066,22.733 20.066,18.669 14.351,18.669 14.351,22.733
BatVoltage on Bottom Solder "NONET_L02_P-001" (solid, pour order 34): 2.413,15.875 2.413,19.685 5.842,19.685 9.906,19.685 9.906,0.127 16.891,0.127 16.891,-6.35 11.684,-6.35 9.779,-8.255 9.779,-13.335 16.002,-13.335 16.002,-21.336 8.636,-21.336 8.636,15.875
BatVoltage on Bottom Solder "NONET_L02_P-001" (solid): 9.652,14.732 16.129,14.732 16.129,7.493 9.525,7.493
VHin on Bottom Solder "NONET_L02_P-001" (solid, pour order 25): -31.242,14.986 -31.242,20.447 -27.686,20.447 -27.686,24.384 -17.653,24.384 -17.653,18.415 -22.098,18.415 -22.098,16.764 -29.591,16.764 -29.591,14.986

## Silkscreen, mask and mechanical layers (free items; w line width, h text height)
Top Overlay:
  lines w0.127: -25.654,-10.033 -25.654,-10.541 ; -25.146,-10.541 -25.654,-10.541 ; -24.257,-10.033 -25.146,-10.033 -25.654,-10.541 ; 9.017,-17.653 14.224,-17.653 ; 20.193,-17.399 24.13,-17.399 24.511,-17.018 26.765,-17.018 29.083,-17.018 30.607,-17.018 ; 32.131,-16.51 42.164,-16.51
  lines w0.254: -29.972,-3.937 -29.972,2.413 -25.654,2.413 -25.527,2.286 ; -20.701,-1.143 -20.701,5.969 ; 4.953,9.144 4.953,8.89 -20.701,8.89 -20.701,24.892 5.207,24.892 5.207,24.003 ; 29.337,16.764 29.337,22.86
  text "PH_A" at 30.61,21.082 h0.7 r90
  text "PH_B" at 30.61,18.923 h0.7 r90
  text "PH_C" at 30.61,16.764 h0.7 r90
  text "BLDC" at 29.146,16.735 h1.2 r90
  text "IR2104" at 21.78,15.24 h0.8 r90
  text "OLED SSD1306" at -14.499,14.922 h2
  text "INA240" at 19.177,10.732 h0.8
  text "3V3" at 8.009,9.906 h0.7 r270
  text "IR2104" at 22.034,3.048 h0.8 r90
  text "INPUT" at -29.503,2.603 h1.2
  text "DIR_IN" at -29.464,1.14 h0.7
  text "10 - 20V" at -19.82,1.016 h0.7 r90
  text "PWM_IN" at -29.464,-0.511 h0.7
  text "GND" at -19.82,-1.016 h0.7 r90
  text "GND" at -29.464,-2.151 h0.7
  text "BATTEERY" at -20.892,-2.696 h1.2 r90
  text "INA240" at 19.431,-3.365 h0.8
  text "3V3" at -29.464,-3.548 h0.7
  text "STM32G431CBU6" at -9.812,-4.779 h0.8 r45
  text "PB2" at 10.033,-5.334 h0.7 r270
  text "PC4" at 6.088,-7.62 h0.7 r90
  text "IPEX" at -24.32,-9.303 h0.8 r90
  text "ST-RESET" at 9.842,-10.096 h0.8 r270
  text "SOLDER TO SELECT ANTENNA" at -24.003,-10.176 h0.7
  text "IR2104" at 21.78,-11.303 h0.8 r90
  text "INA240" at 20.193,-16.192 h0.8
  text "AS5600" at 38.354,-16.447 h1.2
  text "3V3" at -14.478,-16.756 h0.7
  text "STLINK" at 26.67,-16.891 h1
  text "ESP32-C3" at -20.892,-17.081 h0.8 r90
  text "PGO" at 39.265,-17.257 h0.7
  text "SCL" at 32.131,-17.264 h0.7
  text "SDA" at 34.036,-17.264 h0.7
  text "DIR" at 35.814,-17.272 h0.7
  text "OUT" at 37.465,-17.264 h0.7
  text "GND" at 40.894,-17.264 h0.7
  text "TX" at 9.779,-17.399 h0.7 r90
  text "RX" at 10.541,-17.399 h0.7 r90
  text "3V3" at 12.057,-17.399 h0.7 r90
  text "GND" at 11.295,-17.526 h0.7 r90
  text "CLK" at 24.892,-17.645 h0.7
  text "DIO" at 26.416,-17.645 h0.7
  text "GND" at 27.813,-17.645 h0.7
  text "3V3" at 29.337,-17.645 h0.7
  text "UART" at 9.049,-18.351 h1.2 r90
  text "ESP-En" at -21.688,-19.367 h0.8
  text "IO8" at -18.385,-19.367 h0.8
  text "IO9" at -15.972,-19.367 h0.8
  text "USB C 16P" at -9.779,-22.415 h0.8
  text "USB C 16P" at 0.762,-22.415 h0.8
  text "IO3" at -24.63,-23.114 h0.7 r270
  text "ANTENNA" at -30.162,-25.082 h0.8 r90
Bottom Overlay:
  text "W25Q128JVSIQ" at -18.066,-14.859 h0.7 r90
Drill Guide:
  the board outline again, w0.254

## Text inside footprints (layer, text, board x,y; h text height)
C51: Bottom Overlay "+" at 3.781,15.105 h1.22 r180
D1: Top Overlay "+" at 11.43,-7.493 h0.76 r90
D2: Top Overlay "+" at 6.604,-8.509 h0.76
D5: Top Overlay "+" at 9.017,13.843 h0.76 r180
D8: Top Overlay "+" at -10.668,-17.907 h0.76 r90
D19: Top Overlay "+" at -22.987,-20.574 h0.76 r180
Q1: Mechanical 13 "1" at -15.608,23.52 h0.61 r90; Mechanical 13 "2" at -15.608,21.311 h0.61 r90; Mechanical 13 "3" at -15.608,19.126 h0.61 r90; Mechanical 13 "4" at -19.977,21.438 h0.61 r90
Q2: Mechanical 13 "4" at -7.81,14.148 h0.61 r270; Mechanical 13 "3" at -12.179,16.459 h0.61 r270; Mechanical 13 "2" at -12.179,14.275 h0.61 r270; Mechanical 13 "1" at -12.179,12.065 h0.61 r270
Q3: Mechanical 13 "4" at -20.523,6.413 h0.61 r180; Mechanical 13 "3" at -18.212,10.782 h0.61 r180; Mechanical 13 "2" at -20.396,10.782 h0.61 r180; Mechanical 13 "1" at -22.606,10.782 h0.61 r180